# Altium PCB uPre.PcbDoc
Units mil, origin at the board's own origin, x right, y up, seen from the top; angles counter-clockwise.
Board outline 1420 x 850 mil, 2 copper layers (Top Layer, Bottom Layer); 23 components, 15 nets, 56 pads, 8 vias.
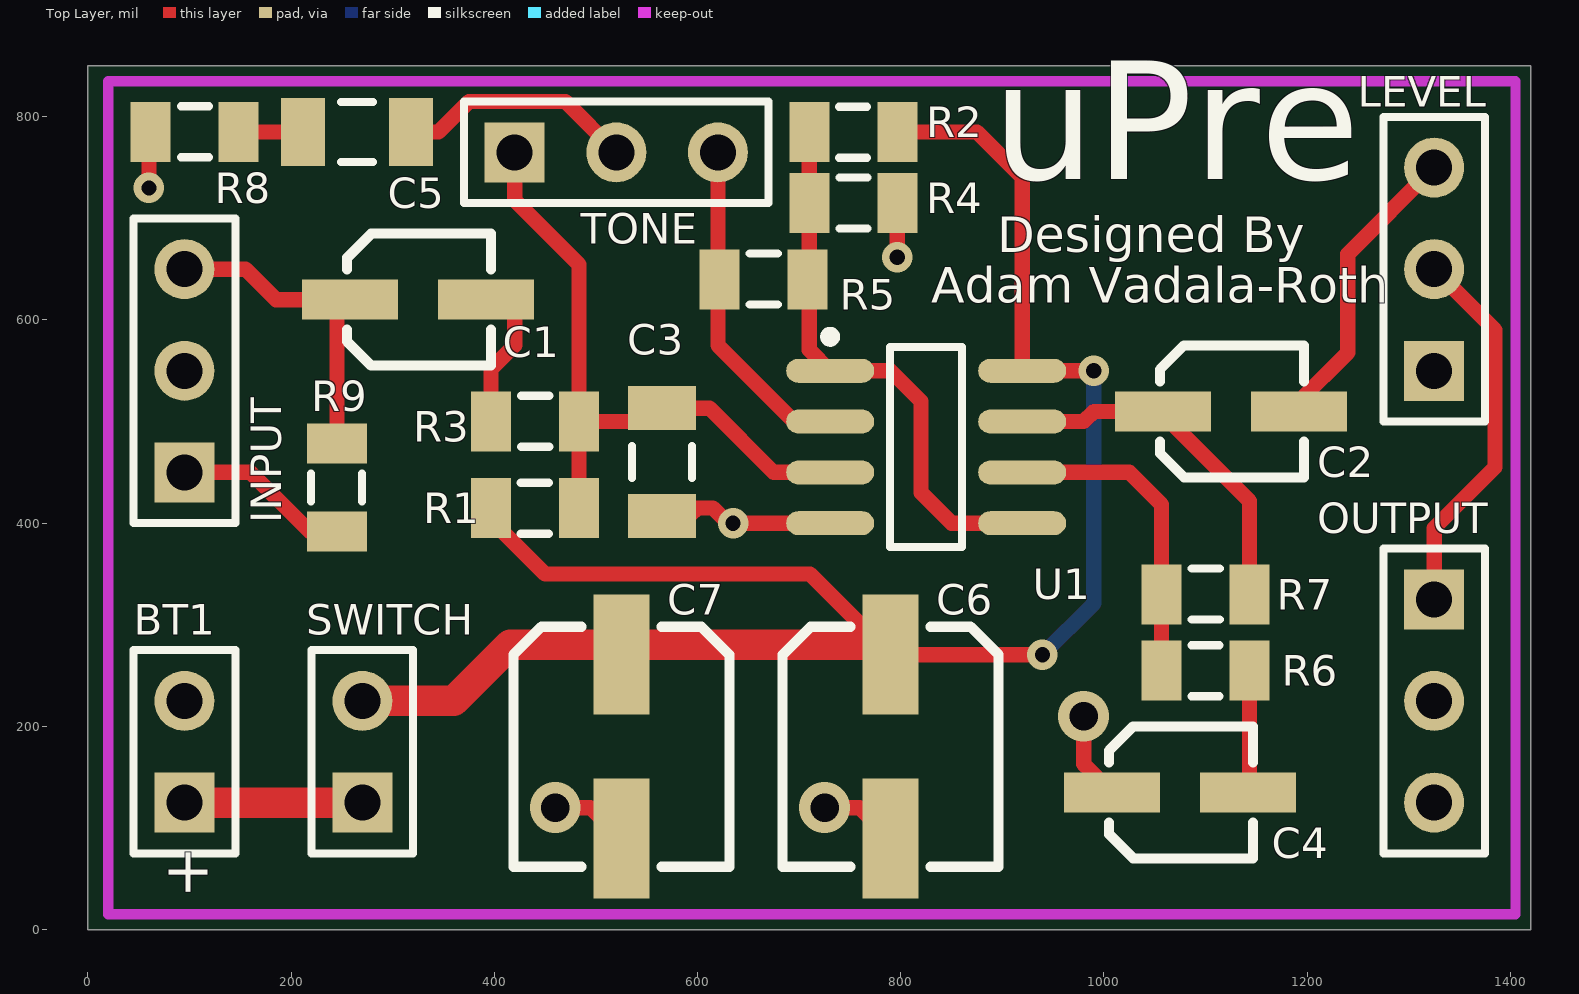
[diagram p0: Top Layer view]
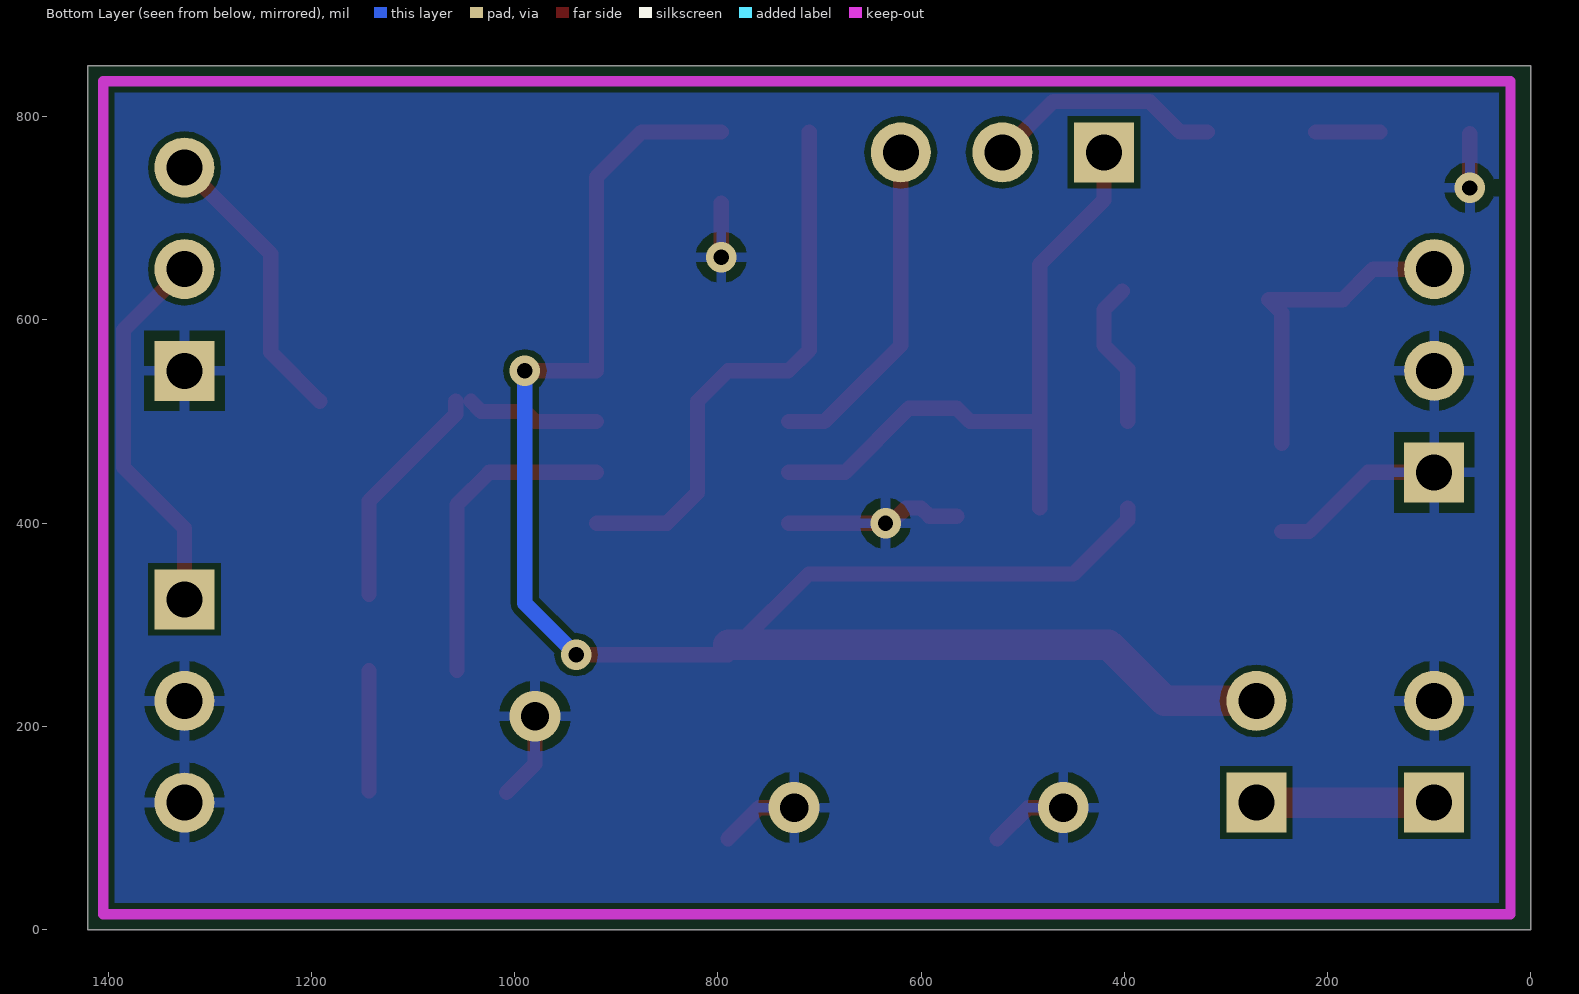
[diagram p1: Bottom Layer view, seen from below]

## Layer stack, top to bottom
Top Layer: signal copper 1.4
Dielectric: dielectric 12.6, FR-4, Dk 4.8
Bottom Layer: signal copper 1.4

## Board outline
0,0 1420,0 1420,850 0,850

## Design rules (kind name [scope] priority, off if disabled: settings)
Clearance [All] p1: gap=6
ComponentClearance [All] p1: gap=0 collisioncheckmode=3 verticalgap=10 showdistances=FALSE
FanoutControl Fanout_SOIC [(InComponent('U8') AND InComponent('U7'))] p3: bgadir=Out bgaviamode=Centered fanoutstyle=Staggered fanoutdirection=Alternating viagrid=1 // Fanout_SOIC (Default Rule)
FanoutControl Fanout_Small [All] p4: bgadir=Out bgaviamode=Centered fanoutstyle=Auto fanoutdirection=Alternating viagrid=1 // Fanout_Small (Default Rule)
HoleSize [All] p1: absolutevalues=TRUE maxlimit=120 minlimit=1 maxpercent=80.000 minpercent=20.000
MinimumSolderMaskSliver [All] p1 off: minsoldermaskwidth=10
PlaneConnect [All] p1: planeconnectstyle=Direct reliefexpansion=20 reliefentries=4 reliefconductorwidth=10 reliefairgap=10
PolygonConnect [All] p1: connectstyle=Relief reliefconductorwidth=10 reliefentries=4 polygonreliefangle="90 Angle" airgapwidth=10
RoutingVias [All] p1: holewidth=15 width=25 viastyle="Through Hole" minholewidth=15 minwidth=25 maxholewidth=28 maxwidth=50
SilkToSilkClearance [All] p1 off: silktosilkclearance=10
SilkToSolderMaskClearance SilkscreenOverComponentPads [IsPad] p1 off: minsilkscreentomaskgap=10 clearancetoexposedcopper=TRUE
SolderMaskExpansion [All] p1: expansion=4
Width [All] p1: maxlimit=30 minlimit=6 preferedwidth=6 minimp=50.000000 maximp=50.000000 favimp=50.000000
20 further rules are at their usual default settings.

## Components (designator, comment, footprint, x,y, rotation, side; value= is the part's Value field where it differs from the comment)
BT1 "Battery" BAT-2 95,175 r90 top
C1 "VS B" "Panasonic VS B" 395,685 r180 top
C2 "VS B" "Panasonic VS B" 1195,575 r180 top
C3 "1206" C1206 565,460 r90 top
C4 "VS B" "Panasonic VS B" 1145,200 r180 top
C5 "1206" C1206 265,785 r0 top
C6 "VS C" "Panasonic VS C" 905,60 r90 top
C7 "VS C" "Panasonic VS C" 640,60 r90 top
INPUT "Header 3" HDR1X3 95,450 r90 top
LEVEL "Header 3" HDR1X3 1325,550 r90 top
OUTPUT "Header 3" HDR1X3 1325,325 r270 top
R1 "0805" "SM 0805 - gap trimmed" 440,415 r0 top
R2 "0805" "SM 0805 - gap trimmed" 753.31,785 r0 top
R3 "0805" "SM 0805 - gap trimmed" 440,500 r180 top
R4 "0805" "SM 0805 - gap trimmed" 753.31,715 r180 top
R5 "0805" "SM 0805 - gap trimmed" 665,640 r180 top
R6 "0805" "SM 0805 - gap trimmed" 1100,255 r0 top
R7 "0805" "SM 0805 - gap trimmed" 1100,330 r180 top
R8 "0805" "SM 0805 - gap trimmed" 105,785 r180 top
R9 "0805" "SM 0805 - gap trimmed" 245,435 r270 top
SWITCH "Header 2" HDR1X2 270,125 r90 top
TONE "TONE" HDR1X3 420,765 r0 top
U1 "RC4580" SOIC127P600X175-8N 825,475 r0 top

## Footprints (in the part's own frame and the unit in brackets; to place one, negate y for a bottom-side part, rotate by r counter-clockwise, add the part's x,y. Pads: shape width x height; smd on the part's side, far side on the other; paste and mask are expansions set on the pad)
BAT-2 [mm] "Battery; 2 Leads"
  rect 1.5x1.5 hole 0.9: 1(-1.27,0)
  round 1.5 hole 0.9: 2(1.27,0)
  silkscreen extent -2.54,-1.27 2.54,1.27
C1206 [mm] "Chip Capacitor, Body 3.2x1.6mm, IPC High Density"
  rect 1.1x1.7 smd: 1(-1.35,0) 2(1.35,0)
  silkscreen extent -0.4,-0.75 0.4,0.75, body extent -1.7,-0.9 1.7,0.9, height 1.3
HDR1X2 [mm] "Connector; Header; 2 Position"
  rect 1.5x1.5 hole 0.9: 1(0,0)
  round 1.5 hole 0.9: 2(2.54,0)
  silkscreen extent -1.27,-1.27 3.81,1.27
HDR1X3 [mm] "Connector; Header; 3 Position"
  rect 1.5x1.5 hole 0.9: 1(0,0)
  round 1.5 hole 0.9: 2(2.54,0) 3(5.08,0)
  silkscreen extent -1.27,-1.27 6.35,1.27
"Panasonic VS B" [mm]
  rect 2.4x1 smd: 1(3.478,1.651) 2(0.078,1.651)
  silkscreen extent -0.05,0 3.55,3.3
"Panasonic VS C" [mm]
  rect 3x1.4 smd: 1(5.348,2.921) 2(0.748,2.921)
  silkscreen extent 0.05,0.22 6.05,5.62, body extent 0.1,0.29 6,5.59, height 5.41
"SM 0805 - gap trimmed" [mm]
  rect 1x1.5 smd: 1(-1.1,0) 2(1.1,0)
  silkscreen extent -0.36,-0.64 0.35,0.63
SOIC127P600X175-8N [mm] "SOIC, 8-Leads, Body 4.75x3.90mm, Pitch 1.27mm, IPC Medium Density"
  oval 2.2x0.6 smd: 1(-2.4,1.905) 2(-2.4,0.635) 3(-2.4,-0.635) 4(-2.4,-1.905) 5(2.4,-1.905) 6(2.4,-0.635) 7(2.4,0.635) 8(2.4,1.905)
  silkscreen extent -2.52,-2.5 0.9,2.88, body extent -2,-2.5 2,2.5, height 1.75

## Part data
BT1: "Multicell Battery"
C1 C2 C4: library part "Cap Pol2", "Polarized Capacitor (Axial)"
C3 C5: library part "Cap Semi", "Capacitor (Semiconductor SIM Model)"
C6 C7: library part "Cap Pol1", "Polarized Capacitor (Radial)"
INPUT LEVEL OUTPUT: "Header, 3-Pin"
R1 R2 R3 R4 R5 R6 R7 R8 R9: library part Res3, "Resistor"
SWITCH: "Header, 2-Pin"
TONE: library part "Header 3", "Header, 3-Pin"
U1: "Low Noise, High Performance, High Fidelity Dual Audio Operational Amplifier, 8-pin Narrow SOIC"

## Via types
v1: diameter 30, hole 15, Top Layer to Bottom Layer, 5 vias
v2: diameter 50, hole 28, Top Layer to Bottom Layer, 3 vias

## Nets (pads, with @x,y where several pads share a name; then routed paths per layer and width w, separated by ;. In a path a pad name is that pad's centre, name@x,y a point inside that pad or via, vN(x,y) a via of type N, cw(c..) or ccw(c..) an arc to the next point about the centre after c; other vN are vias at no path point)
9VCC: C6.1 C7.1 R1.1 R2.2 SWITCH.2 U1.8 | length 1855.2
  Top Layer w15: R1.1 396.69,403.31 450,350 710.55,350 780,280.55 C6.1 v1(939.45,270.55) ; R2.2 875,785 919.49,740.51 U1.8 v1(990,550)
  Top Layer w30: SWITCH.2 360,225 415.55,280.55 780,280.55 C6.1@790,280.55
  Bottom Layer w15: v1(939.45,270.55) 990,321.1 v1(990,550)
GND: BT1.2 C3.1 C4.1 C6.2 C7.2 INPUT.1 INPUT.2 LEVEL.1 OUTPUT.2 OUTPUT.3 R4.1 R8.2 R9.2 U1.4 | length 697.9
  Top Layer w15: v1(60,730) R8.2@60,783.31 ; INPUT.1 160,450 218.31,391.69 R9.2 ; v2(460,120) 494.45,120 C7.2 ; C3.1 591.85,406.85 600,415 615,415 630,400 U1.4 ; v2(725,120) 759.45,120 C6.2 ; v1(796.61,661.61) R4.1 ; v2(980,210) 980,163.07 C4.1
  other v1: 635,400
NetBT1_1: BT1.1 SWITCH.1 | length 175
  Top Layer w30: BT1.1 SWITCH.1
NetC1_1: C1.1 INPUT.3 R9.1 | length 322.6
  Top Layer w15: INPUT.3 155,650 185,620 C1.1 245,606.93 R9.1
NetC1_2: C1.2 R3.2 | length 145.6
  Top Layer w15: R3.2 396.69,551.69 420,575 420,610.37 C1.2@401.93,628.44
NetC2_1: C2.1 R7.1 U1.7 | length 357.2
  Top Layer w15: U1.7 980,500 990,510 1033.07,510 C2.1@1043.07,520 ; C2.1@1058.07,520 1058.07,506.93 1143.31,421.69 R7.1
NetC2_2: C2.2 LEVEL.3 | length 285.1
  Top Layer w15: C2.2@1191.93,520 1240,568.07 1240,665 LEVEL.3
NetC3_2: C3.2 R1.2 R3.1 TONE.1 U1.3 | length 655
  Top Layer w15: TONE.1 420,717.95 483.31,654.64 R3.1 ; R1.2 R3.1 ; U1.3 675,450 611.85,513.15 C3.2 551.85,500 R3.1
NetC4_2: C4.2 R6.2 | length 120.6
  Top Layer w10: C4.2 C4.2@1143.31,136.38
  Top Layer w15: C4.2@1143.31,136.38 R6.2
NetC5_1: C5.1 R8.1 | length 63.5
  Top Layer w15: R8.1 C5.1
NetC5_2: C5.2 TONE.2 | length 235
  Top Layer w15: C5.2 345,785 375,815 470,815 TONE.2
NetLEVEL_2: LEVEL.2 OUTPUT.1 | length 374.7
  Top Layer w15: OUTPUT.1 1325,395 1385,455 1385,590 LEVEL.2
NetR2_1: R2.1 R4.2 R5.1 U1.1 U1.5 | length 547.3
  Top Layer w15: R2.1 710,570.51 U1.1 790,550 820,520 820,430 850,400 U1.5
NetR5_2: R5.2 TONE.3 U1.2 | length 331.6
  Top Layer w15: TONE.3 620,705 620,575 673.7,521.3 695,500 U1.2
NetR6_1: R6.1 R7.2 U1.6 | length 313.6
  Top Layer w15: U1.6 1025,450 1056.69,418.31 R7.2 R6.1

## Polygon pours and split planes (outlines as drawn)
GND on Bottom Layer "Top Layer-No Net" (solid, remove dead copper, pour order 2): 0,0 1420,0 1420,850 0,850

## Keep-outs
Keep-Out Layer:
  lines w10: 20,15 20,50 20,835 1405,835 1405,15 20,15

## Silkscreen, mask and mechanical layers (free items; w line width, h text height)
Top Overlay:
  text "uPre" at 890,700 h200
  text "Designed By" at 895,655 h60
  text "Adam Vadala-Roth" at 830,605 h60
Mechanical 15:
  lines w10: 0,0 1420,0 1420,850 0,850 0,55 0,0

## Text inside footprints (layer, text, board x,y; h text height)
BT1: Top Overlay "+" at 117.72,30.51 h45.28 r90